# Altium PCB SIM7600_M_V1.0.1.PcbDoc
Units mm, origin at the board's own origin, x right, y up, seen from the top; angles counter-clockwise.
Board outline 149.61 x 116.74 mm, 2 copper layers (Top Layer, Bottom Layer); 83 components, 49 nets, 274 pads, 135 vias.
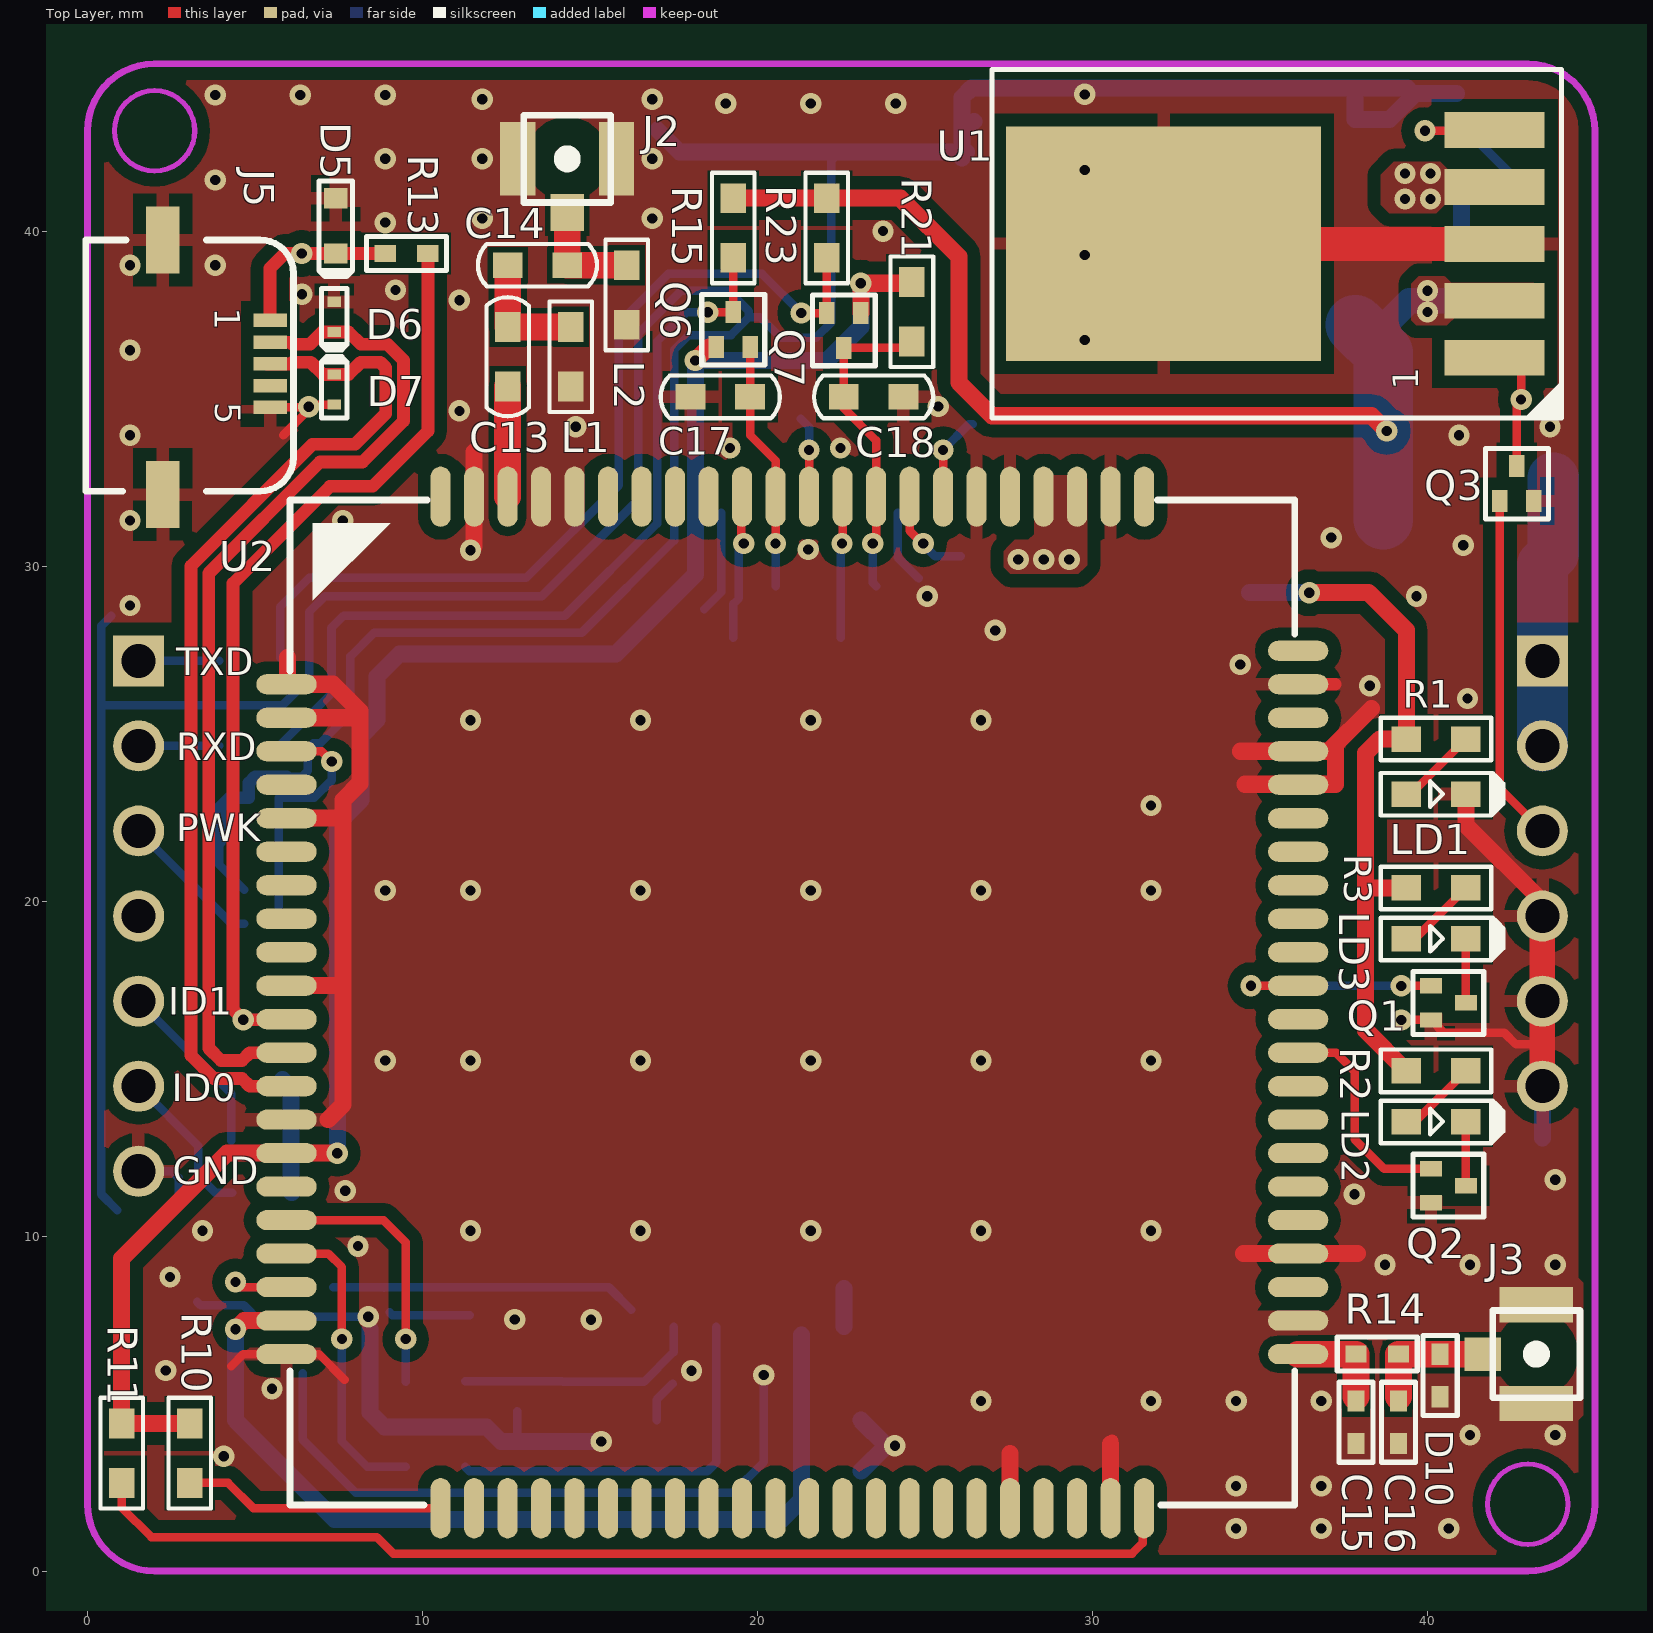
[diagram p0: Top Layer view]
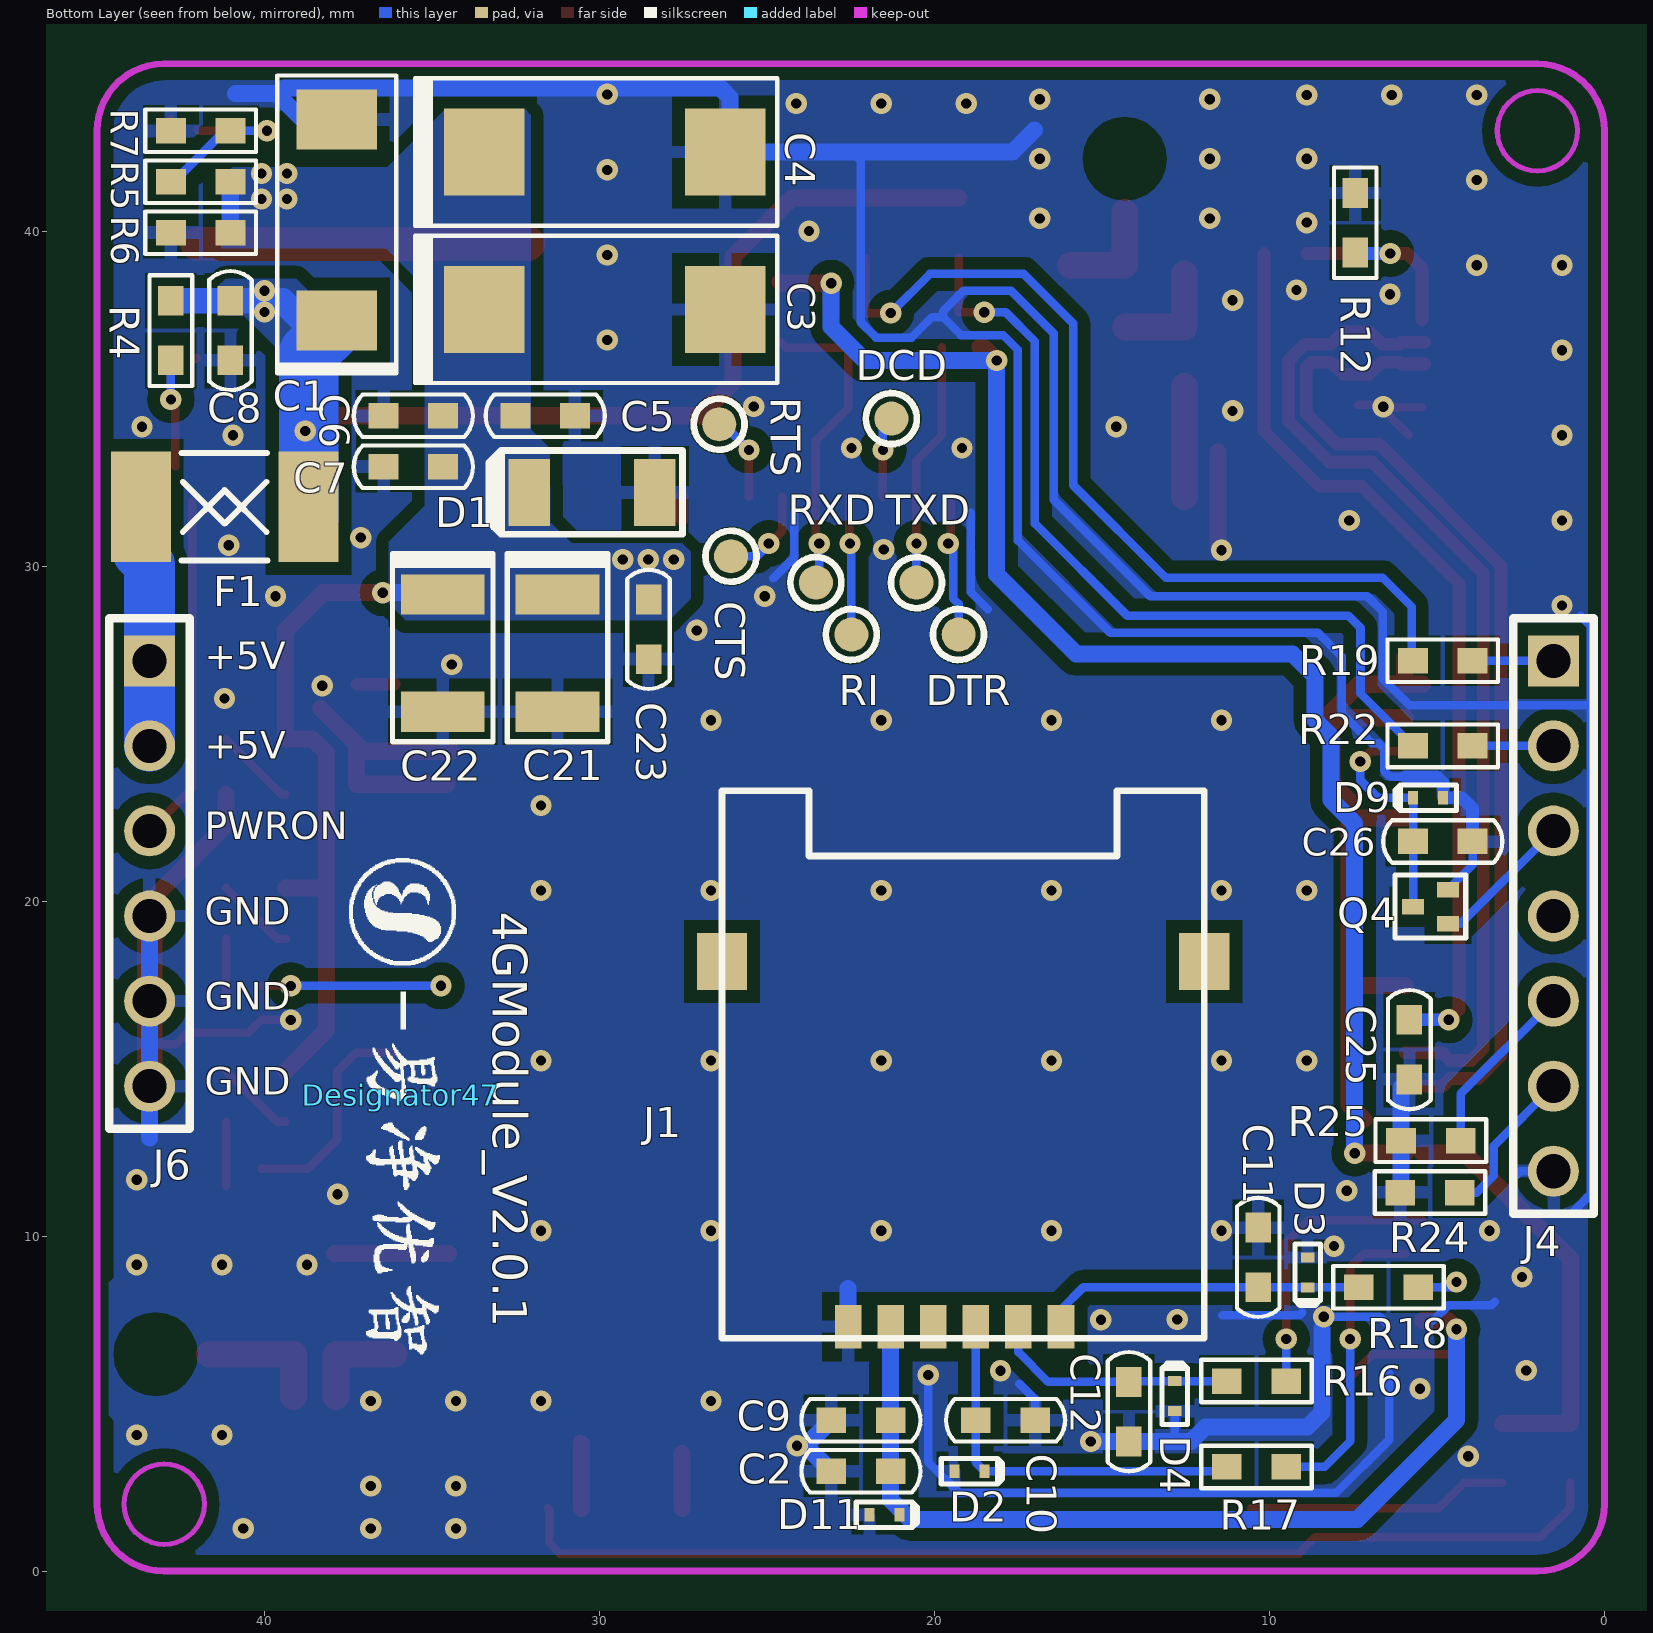
[diagram p1: Bottom Layer view, seen from below]

## Layer stack, top to bottom
Top Layer: signal copper 0.0356
Dielectric: dielectric 0.32, FR-4, Dk 4.8
Bottom Layer: signal copper 0.0356

## Board outline
-44.3,72.578 -44.3,-38.903 -43.132,-40.071 98.854,-40.071 100.023,-38.903 105.306,-33.619 105.306,67.879 96.517,76.667 -37.849,76.667

## Design rules (kind name [scope] priority, off if disabled: settings)
Clearance [All] p1: gap=0.152
ComponentClearance [All] p1: gap=0.127 collisioncheckmode=2 verticalgap=0.254
DiffPairsRouting DiffPair_DiffPairsRouting [InDifferentialPair ('NewDifferentialPair1')] p1: maxlimit=2.54 minlimit=0.152 mostfreqgap=0.152 maxuncoupledlength=12.7
DiffPairsRouting [All] p2: maxlimit=2.54 minlimit=0.152 mostfreqgap=0.152 maxuncoupledlength=12.7
MatchedLengths DiffPair_MatchedLengths [InDifferentialPair ('NewDifferentialPair1')] p1: tolerance=25.4 checknetsindiffpair=TRUE checkdiffpairvsdiffpair=TRUE checkothers=TRUE
PlaneClearance [All] p1: clearance=0.15
PlaneConnect [All] p1: planeconnectstyle=Relief reliefexpansion=0.508 reliefentries=4 reliefconductorwidth=0.508 reliefairgap=0.254
PolygonConnect [All] p1: connectstyle=Relief reliefconductorwidth=0.381 reliefentries=4 polygonreliefangle="90 Angle"
RoutingCorners [All] p1: cornerstyle=Round minsetback=10 maxsetback=10
RoutingVias [All] p1: holewidth=0.711 width=1.27 viastyle="Through Hole" minholewidth=0.305 minwidth=0.635 maxholewidth=1.27 maxwidth=1.27
SolderMaskExpansion [All] p1: expansion=0.102
TestPointUsage [All] p1: valid=0 allowmultiple=FALSE
Testpoint [All] p1: side=15 testpointundercomponent=TRUE minsize=1.016 maxsize=2.54 preferedsize=1.524 minholesize=0 maxholesize=1.016 preferedholesize=0.813 testpointgrid=0.025 style=1021 order=0-112345678
Width DiffPair_Width [InDifferentialPair('NewDifferentialPair1')] p1: maxlimit=0.381 minlimit=0.381 preferedwidth=0.381
Width [All] p2: maxlimit=5.08 minlimit=0.254 preferedwidth=0.381
14 further rules are at their usual default settings.

## Classes and differential pairs
differential pair NewDifferentialPair1: +4G_USB_P -4G_USB_N

## Components (designator, comment, footprint, x,y, rotation, side; value= is the part's Value field where it differs from the comment)
C1 "100uF/16V" C_TAN_C 37.846,40.335 r90 bottom
C2 "33PF" 0603_C 21.308,2.982 r0 bottom
C3 "220uF/10V" C_TAN_D 29.845,37.668 r180 bottom
C4 "220uF/10V" C_TAN_D 29.845,42.367 r180 bottom
C5 "0.1uF" 0603_C 30.734,34.493 r0 bottom
C6 "2.2μF" 0603_C 36.449,34.493 r180 bottom
C7 "33PF" 0603_C 36.449,32.969 r180 bottom
C8 "0.1uF" 0603_C 41.021,36.147 r90 bottom
C9 "0.1uF" 0603_C 21.308,4.506 r0 bottom
C10 "33PF" 0603_C 16.99,4.506 r0 bottom
C11 "33PF" 0603_C 10.338,10.255 r270 bottom
C12 "33PF" 0603_C 14.196,3.871 r90 bottom
C13 "27PF" 0603_C 12.543,35.367 r90 top
C14 "27PF" 0603_C 12.543,38.989 r0 top
C15 "NC" 0402 37.868,3.81 r90 top
C16 "NC" 0402 39.138,3.81 r90 top
C17 "1NF" 0603_C 19.779,35.057 r180 top
C18 "100PF" 0603_C 24.356,35.057 r180 top
C21 "47uF/10V" C_TAN_B 31.256,29.156 r270 bottom
C22 "47uF/10V" C_TAN_B 34.685,29.156 r270 bottom
C23 "1uF" 0603_C 28.538,27.226 r90 bottom
C25 "33PF" 0603_C 5.823,16.459 r270 bottom
C26 "0.1uF" 0603_C 3.937,21.785 r0 bottom
CTS "Component_1" TP-40 26.074,30.299 r0 bottom (schematic designator TP3)
D1 "BZV55C5V1" SOD-80 30.226,32.207 r0 bottom
D2 "ESD9M5.0ST5G" SOD-923 19.403,2.982 r0 bottom
D3 "ESD9M5.0ST5G" SOD-923 8.862,9.366 r90 bottom
D4 "ESD9M5.0ST5G" SOD-923 12.827,4.775 r270 bottom
D5 "PESD12VS1UB" SOD523 7.41,40.988 r90 top
D6 "ESD9L5.0ST5G" SOD-923 7.36,37.896 r90 top
D7 "ESD9L5.0ST5G" SOD-923 7.36,34.823 r270 top
D9 "ESD9M5.0ST5G" SOD-923 4.815,23.089 r180 bottom
D10 "LXES15AAA1-153" 0402 40.383,6.477 r270 top
D11 "ESD9M5.0ST5G" SOD-923 21.943,1.681 r0 bottom
DCD "Component_1" TP-40 21.285,34.408 r0 bottom (schematic designator TP5)
Designator47 "Comment" PIC_AIRFACTORY-1500 35.941,14.224 r270 bottom
DTR "Component_1" TP-40 19.28,27.962 r0 bottom (schematic designator TP4)
F1 "Fuse 2A" 1812_F 43.688,31.775 r180 bottom
J1 "SIM_Card" MicroSIM-6 22.578,7.3 r180 bottom
J2 "CON2" RF-Z 14.321,42.164 r0 top
J3 "CON2" RF-Z 43.253,6.477 r270 top
J4 "CON7" SIP7 1.524,27.178 r270 bottom
J5 "USB" MICROUSB_SMD1 2.743,36.043 r270 top
J6 "CON6" SIP6 43.434,27.178 r270 bottom
L1 "NC" 0603_R 14.425,35.367 r90 top
L2 "NC" 0603_R 16.099,37.211 r90 top
LD1 "WHITE" LED_0603 39.37,23.19 r0 top
LD2 "WHITE" LED_0603 39.37,13.411 r0 top
LD3 "WHITE" LED_0603 39.37,18.872 r0 top
Q1 "DTC143ZEBTL" SC-89 40.107,17.472 r270 top
Q2 "DTC143ZEBTL" SC-89 40.107,12.014 r270 top
Q3 "DTC143ZEBTL" SC-89 42.164,31.946 r0 top
Q4 "DTC143ZEBTL" SC-89 4.674,19.329 r90 bottom
Q6 "DTC143ZEBTL" SC-89 18.768,36.544 r0 top
Q7 "DTC143ZEBTL" SC-89 23.086,37.56 r180 top
R1 "1K" 0603_R 39.37,24.841 r0 top
R2 "1K" 0603_R 39.37,14.935 r0 top
R3 "1K" 0603_R 39.37,20.396 r0 top
R4 "47K" 0603_R 42.799,37.925 r270 bottom
R5 "100K" 0603_R 42.799,41.478 r180 bottom
R6 "750R" 0603_R 42.799,39.954 r180 bottom
R7 "47K" 0603_R 41.021,43.002 r0 bottom
R10 "NC" 0603_R 3.05,4.411 r270 top
R11 "NC" 0603_R 1.018,4.411 r270 top
R12 "47K" 0603_R 7.438,39.366 r90 bottom
R13 "0R" 0402 10.16,39.338 r180 top
R14 "0R" 0402 39.138,6.477 r180 top
R15 "10K" 0603_R 19.276,40.989 r270 top
R16 "22R" 0603_R 11.275,5.675 r180 bottom
R17 "22R" 0603_R 11.275,3.109 r180 bottom
R18 "22R" 0603_R 7.338,8.477 r180 bottom
R19 "0R" 0603_R 3.937,27.178 r0 bottom
R21 "20K" 0603_R 24.61,38.486 r270 top
R22 "0R" 0603_R 3.937,24.638 r0 bottom
R23 "10K" 0603_R 22.07,39.211 r90 top
R24 "0R" 0603_R 6.096,11.303 r180 bottom
R25 "0R" 0603_R 4.293,12.852 r0 bottom (schematic designator 25)
RI "Component_1" TP-40 22.481,27.962 r0 bottom (schematic designator TP2)
RTS "Component_1" TP-40 26.427,34.239 r0 bottom (schematic designator TP7)
RXD "Component_1" TP-40 23.541,29.512 r90 bottom (schematic designator TP6)
TXD "Component_1" TP-40 20.541,29.512 r180 bottom (schematic designator TP1)
U1 "MIC29302" TO-263-5 42.004,36.225 r90 top
U2 "SIM7600CE" SIM7600 5.941,26.477 r0 top

## Footprints (in the part's own frame and the unit in brackets; to place one, negate y for a bottom-side part, rotate by r counter-clockwise, add the part's x,y. Pads: shape width x height; smd on the part's side, far side on the other; paste and mask are expansions set on the pad)
0402 [mil]
  rect 25x20 smd: 1(0,0) 2(50,0)
  silkscreen extent -22,-20 72,20
0603_C [mil]
  rect 35x30 smd: 1(0,0) 2(70,0)
  silkscreen extent -35,-25 105,25, body extent 5,-15 65,15, height 39
0603_R [mil]
  rect 35x30 smd: 1(0,0) 2(70,0)
  silkscreen extent -30,-25 100,25, body extent 5,-15 65,15, height 39
1812_F [mm]
  rect 1.8x3.3 smd: 1(0,0) 2(5,0)
  silkscreen extent 1.2,-1.6 3.78,1.6
C_TAN_B [mm]
  rect 1.2x2.5 smd: 1(0,0) 2(3.5,0)
  silkscreen extent -1.22,-1.5 4.39,1.5, body extent 0,-1.5 3.5,1.5, height 2
C_TAN_C [mm]
  rect 1.8x2.4 smd: 1(-3,0) 2(3,0)
  silkscreen extent -4.57,-1.78 4.32,1.78, body extent -3,-1.78 3,1.78, height 2.6
C_TAN_D [mm]
  rect 2.4x2.6 smd: 1(-3.6,0) 2(3.6,0)
  silkscreen extent -5.67,-2.2 5.15,2.2, body extent -3.67,-2.2 3.53,2.2, height 4.3
LED_0603 [mil]
  rect 35x30 smd: A(0,0) K(70,0)
  silkscreen extent -30,-25 114,25
MicroSIM-6 [mm]
  rect 1.5x1.7 smd: 0(-3.77,10.9) 0(10.63,10.9)
  rect 0.8x1.3 smd: 1(1.27,0) 2(3.81,0) 3(6.35,0) 5(0,0) 6(2.54,0) 7(5.08,0)
  silkscreen extent -3.77,-0.35 10.63,16
MICROUSB_SMD1 [mm]
  rect 0.4x1 smd: 1(-1.299,2.705) 2(-0.649,2.705) 3(0.001,2.705) 4(0.651,2.705) 5(1.301,2.705)
  rect 2x1 smd: 6(-3.699,-0.495) 7(3.901,-0.495)
  silkscreen extent -3.7,-2.8 3.8,3.4
PIC_AIRFACTORY-1500 [mm]
  silkscreen extent -7.06,-1.52 7.75,1.65
RF-Z [mm]
  rect 1x1.1 smd: 1(0,-1.6)
  rect 1.05x2.2 smd: 2(-1.475,0) 2(1.475,0)
  silkscreen extent -1.3,-1.3 1.3,1.3
SC-89 [mil]
  rect 18x26 smd: 1(0,0) 2(40,0) 3(20,41)
  silkscreen extent -17,-21 57,62
SIM7600 [mm]
  oval 1.8x0.6 smd: 1(0,0) 2(0,-1) 3(0,-2) 4(0,-3) 5(0,-4) 6(0,-5) 7(0,-6) 8(0,-7) 9(0,-8) 10(0,-9) 11(0,-10) 12(0,-11) 13(0,-12) 14(0,-13) 15(0,-14) 16(0,-15) 17(0,-16) 18(0,-17) 19(0,-18) 20(0,-19) 41(30.2,-19) 42(30.2,-18) 43(30.2,-17) 44(30.2,-16) 45(30.2,-15) 46(30.2,-14) 47(30.2,-13) 48(30.2,-12) 49(30.2,-11) 50(30.2,-10) 51(30.2,-9) 52(30.2,-8) 53(30.2,-7) 54(30.2,-6) 55(30.2,-5) 56(30.2,-4) 57(30.2,-3) 58(30.2,-2) 59(30.2,-1) 60(30.2,0) 81(0,-20) 82(30.2,-20) 85(30.2,1)
  oval 0.6x1.8 smd: 21(5.6,-24.6) 22(6.6,-24.6) 23(7.6,-24.6) 24(8.6,-24.6) 25(9.6,-24.6) 26(10.6,-24.6) 27(11.6,-24.6) 28(12.6,-24.6) 29(13.6,-24.6) 30(14.6,-24.6) 31(15.6,-24.6) 32(16.6,-24.6) 33(17.6,-24.6) 34(18.6,-24.6) 35(19.6,-24.6) 36(20.6,-24.6) 37(21.6,-24.6) 38(22.6,-24.6) 39(23.6,-24.6) 40(24.6,-24.6) 61(24.6,5.6) 62(23.6,5.6) 63(22.6,5.6) 64(21.6,5.6) 65(20.6,5.6) 66(19.6,5.6) 67(18.6,5.6) 68(17.6,5.6) 69(16.6,5.6) 70(15.6,5.6) 71(14.6,5.6) 73(12.6,5.6) 74(11.6,5.6) 75(10.6,5.6) 76(9.6,5.6) 77(8.6,5.6) 78(7.6,5.6) 79(6.6,5.6) 80(5.6,5.6) 83(25.6,-24.6) 84(4.6,-24.6) 86(4.6,5.6) 87(25.6,5.6)
  oval 0.6x1.8 smd paste+0: 72(13.6,5.6)
  silkscreen extent 0.1,-24.5 30.1,5.5
SIP6 [mil]
  rect 60x60 hole 40: 1(0,0)
  round 60 hole 40: 2(100,0) 3(200,0) 4(300,0) 5(400,0) 6(500,0)
  silkscreen extent -50,-47 550,47
SIP7 [mil]
  rect 60x60 hole 40: 1(0,0)
  round 60 hole 40: 2(100,0) 3(200,0) 4(300,0) 5(400,0) 6(500,0) 7(600,0)
  silkscreen extent -50,-47 650,47
SOD523 [mm]
  rect 0.6x0.7 smd: 1(0,0) 2(-1.65,0)
  silkscreen extent -2.34,-0.5 0.51,0.5
SOD-80 [mm]
  rect 1.25x2 smd: 1(-1.875,0) 2(1.875,0)
  silkscreen extent -2.7,-1.25 3.08,1.25
SOD-923 [mm]
  rect 0.3x0.4 smd: 1(0,0) 2(-0.9,0)
  silkscreen extent -1.43,-0.38 0.4,0.38
TO-263-5 [mm]
  rect 1.07x3 smd: 1(0,0) 2(1.7,0) 3(3.4,0) 4(5.1,0) 5(6.8,0)
  rect 7x9.4 smd: 6(3.41,9.878)
  silkscreen extent -1.8,-2 8.6,15, body extent 0,0 6.8,12.6, height 4.5
TP-40 [mil]
  round 40 smd: 1(0,0)
  silkscreen extent -30,-30 30,30

## Part data
C1 C3 C4 C21 C22: library part ECAP, "E-CAP"
C2 C9 C10 C11 C12 C13 C14 C15 C16 C25: library part CAP, "CAP"
C5 C6 C7 C8 C17 C18 C23 C26: library part "Cap Semi", "Capacitor"
D1 D9 D11: library part "DIODE SCHOTTKY"
D2 D3 D4 D5 D6 D7 D10: library part "DIODE TVS BI-DIR"
F1: library part "Fuse 1", "Fuse"
J4: library part CON8
J5: library part USB-M
J6: library part CON7
L1 L2: library part L
LD1 LD2 LD3: library part LED, "LED"
Q1 Q2 Q3 Q4: library part NPN
Q6 Q7: library part DTC143ZETL
R1 R2 R3 R6 R10 R11 R12 R13 R14 R15 R19 R21 R22 R23 R24 R25: library part RES1
R4 R5 R7 R16 R17 R18: library part R0.25W, "RESISTOR"
U2: library part L506

## Via types
v1: diameter 0.635, hole 0.305, Top Layer to Bottom Layer, tented both sides, 135 vias

## Nets (pads, with @x,y where several pads share a name; then routed paths per layer and width w, separated by ;. In a path a pad name is that pad's centre, name@x,y a point inside that pad or via, vN(x,y) a via of type N, cw(c..) or ccw(c..) an arc to the next point about the centre after c; other vN are vias at no path point)
4G_MAIN_ANT: C15.2 R14.2 U2.82 | length 3
  Top Layer w0.8: U2.82 R14.2 C15.2@37.868,5.207
4G_NETLIGHT: Q1.1 U2.51 | length 6.8
  Top Layer w0.254: v1(34.735,17.477) U2.51 ; v1(39.218,17.472) Q1.1
  Bottom Layer w0.254: v1(34.735,17.477) 39.213,17.477 v1(39.218,17.472)
4G_STATUS: Q2.1 U2.49 | length 6.6
  Top Layer w0.254: U2.49 37.276,15.477 37.829,14.924 37.829,12.892 38.706,12.014 Q2.1
4G_USB_N: D6.2 J5.2 U2.12 | length 30.9
  Top Layer w0.381: J5.2@5.364,36.684 5.448,36.684 6.062,36.684 6.12,36.626 6.638,36.626 7.008,36.996 D6.2 7.79,36.996 8.16,36.626 8.959,36.626 9.436,36.149 9.436,34.336 8.209,33.109 6.939,33.109 3.62,29.789 3.62,15.773 3.62,15.611 3.987,15.244 4.609,15.244 4.842,15.477 U2.12
4G_USB_P: D7.2 J5.3 U2.13 | length 30.9
  Top Layer w0.381: J5.3@5.364,36.034 5.448,36.034 6.062,36.034 6.12,36.093 6.661,36.093 7.031,35.723 D7.2 7.788,35.723 8.158,36.093 8.738,36.093 8.903,35.928 8.903,34.557 7.988,33.642 6.718,33.642 3.086,30.01 3.086,15.391 3.766,14.71 4.609,14.71 4.842,14.477 U2.13
4G_USB_VBUS: C25.1 R13.1 U2.11 | length 28.6
  Top Layer w0.381: v1@4.63,16.477 4.343,16.764 4.343,29.489 7.239,32.385 8.509,32.385 10.16,34.036 R13.1 ; v1(4.648,16.459) 5.923,16.459 U2.11
  Bottom Layer w0.381: v1(4.648,16.459) C25.1 C25.1@5.841,16.477
+3.8V: C3.1 C4.1 C5.2 C6.2 C7.2 C21.1 C22.1 C23.2 D1.2 R1.1 R2.1 R3.1 R5.2 R6.2 U1.4 U2.62 U2.63 | length 22.5
  Top Layer w0.508: v1(36.471,29.21) 38.249,29.21 39.37,28.089 R1.1 38.579,24.841 38.159,24.421 38.159,16.146 R2.1 ; 38.159,20.393 38.162,20.396 R3.1
  Bottom Layer w0.508: C22.1@34.693,29.21 v1(36.471,29.21) ; R6.2 R5.2
  other v1: 27.785,30.199 28.547,30.199 29.309,30.199 39.333,40.966 40.095,40.966 39.333,41.728 40.095,41.728
+5V: C1.1 C8.2 F1.2 R4.1 R15.1 R23.2 U1.2 | length 35.6
  Top Layer w0.508: R15.1 24.264,40.989 26.01,39.243 26.01,35.484 27,34.493 38.329,34.493 v1(38.786,34.036)
  Bottom Layer w0.508: F1.2@38.354,31.238 F1.2@38.688,31.572 ; F1.2@38.608,31.619 F1.2@38.688,31.699
  Bottom Layer w0.762: C1.1@38.702,37.29 38.829,37.29 39.464,37.925 R4.1
  Bottom Layer w1.778: C1.1@37.846,37.208 38.688,36.366 F1.2 ; F1.2@38.688,31.394 F1.2@38.688,31.699
  other v1: 40.005,37.592 40.005,38.227
COEX1: R11.2 U2.83 | length 33
  Top Layer w0.254: R11.2 1.018,1.903 1.905,1.016 8.636,1.016 9.127,0.525 31.183,0.525 31.496,0.838 31.496,1.832 U2.83
COEX2: R10.2 U2.84 | length 7.8
  Top Layer w0.254: R10.2 4.193,2.633 4.949,1.877 U2.84
CTS: CTS.1 U2.67 | length 2.9
  Top Layer w0.254: U2.67 24.541,31.061 v1@24.922,30.68
  Bottom Layer w0.254: v1@24.922,30.68 25.303,30.299 CTS.1
  other v1: 24.947,30.68
DCD: DCD.1 U2.70 | length 2.4
  Top Layer w0.254: U2.70 v1(21.541,33.474)
  Bottom Layer w0.254: DCD.1 21.541,34.153 v1(21.541,33.474)
DTR: DTR.1 U2.72 | length 4.3
  Top Layer w0.254: v1@19.522,30.699 U2.72@19.522,32.077
  Bottom Layer w0.254: DTR.1@19.28,27.861 19.28,28.873 19.448,29.04 19.448,30.536 v1(19.592,30.68)
GND: C1.2 C2.2 C3.2 C4.2 C5.1 C6.1 C7.1 C8.1 C9.2 C10.1 C11.1 C12.1 C15.1 C16.1 C17.2 C18.1 C21.2 C22.2 C23.1 C25.2 C26.1 D1.1 D2.1 D3.1 D4.1 D5.1 D6.1 D7.1 D9.1 D10.2 D11.1 J1.5 J2.2 J3.2 J4.7 J5.5 J5.6 J5.7 J6.4 J6.5 J6.6 L1.1 L2.1 LD1.K Q1.2 Q2.2 Q3.2 Q4.2 R6.1 R7.2 R12.2 R24.1 R25.2 U1.3 U1.6 U2.1 U2.2 U2.5 U2.10 U2.14 U2.37 U2.40 U2.41 U2.43 U2.57 U2.58 U2.60 U2.61 U2.64 U2.65 U2.77 U2.78 U2.80 U2.81 | length 245.8
  Top Layer w0.254: 4.293,6.121 4.648,6.477 6.909,6.477 7.671,5.715 ; J5.5@5.448,34.742 v1@6.585,34.742 ; 5.842,33.909 v1@6.585,34.652 ; v1@6.666,34.823 D7.1 ; v1(39.218,16.456) Q1.2 40.488,16.075 42.294,16.075 42.647,15.723 43.383,15.723
  Top Layer w0.381: 7.577,17.477 7.631,17.531 ; U2.37 U2.37@27.541,2.66 ; U2.64@27.541,31.398 U2.64 ; 30.541,3.795 30.541,3.842 30.582,3.883 ; 34.537,23.477 34.551,23.477 ; U2.60 37.252,26.477 ; 37.405,24.776 37.405,24.832
  Top Layer w0.508: U2.1@5.433,26.477 7.327,26.477 8.128,25.676 8.128,23.52 7.631,23.023 7.631,13.928 7.18,13.477 ; U2.10 7.582,17.477 ; U2.5 7.631,22.477 ; U2.2 8.038,25.477 8.128,25.567 ; U2.1@5.969,26.477 5.969,27.28 ; v1@11.541,30.591 11.541,33.409 ; U2.37 27.541,3.513 ; U2.40 30.541,3.795 ; 34.426,24.477 37.05,24.477 38.329,25.756 ; 34.516,9.477 37.919,9.477 ; 34.551,23.492 37.258,23.492 37.258,24.685 ; LD1.K 41.148,22.273 43.434,19.987 J6.4
  Top Layer w0.762: J6.6 J6.4
  Top Layer w1.016: U1.6 32.137,39.625 U1.3
  Bottom Layer w0.254: 0.406,25.854 5.825,25.854 6.622,26.651 6.622,28.645 7.083,29.105 13.56,29.105 16.442,31.987 16.442,36.954 17.712,38.224 19.135,38.224 19.744,37.614 19.744,37.436 ; 0.711,28.524 0.406,28.219 0.406,11.252 0.889,10.77 ; J4.7 2.52,11.938 2.718,11.74 2.718,11.125 ; 3.274,8.037 3.376,7.935 4.664,7.935 5.121,7.478 ; C26.1 3.937,21.082 Q4.2 ; 5.944,23.715 6.401,23.715 6.579,23.893 6.579,24.553 6.736,24.711 6.943,24.711 7.849,25.617 7.849,27.309 8.553,28.013 14.754,28.013 17.509,30.768 17.509,36.457 17.955,36.903 19.211,36.903 19.744,37.436 ; 6.424,5.904 6.424,3.923 8.011,2.335 19.264,2.335 20.19,3.261 v1(20.19,5.852) ; 6.477,7.366 6.706,7.595 v1(8.382,7.595) ; 9.017,7.722 9.093,7.645 11.405,7.645 ; 12.827,4.026 D4.1 ; C10.1 16.99,5.065 ; 16.99,5.116 17.473,5.598 ; 18.415,28.721 18.923,29.229 18.923,31.591 ; 22.462,42.367 22.208,42.113 22.208,37.284 21.751,36.827 20.684,36.827 20.074,37.436 19.744,37.436 ; 24.181,31.591 24.181,30.27 24.816,29.635
  Bottom Layer w0.381: C26.1 3.937,22.775 4.25,23.089 D9.1 4.815,23.526 5.004,23.715 5.944,23.715
  Bottom Layer w0.508: C25.2 6.071,14.434 6.071,11.328 R24.1 ; 8.43,7.225 8.43,4.735 8.862,4.304 11.91,4.304 12.343,3.871 C12.1 v1(15.339,3.871) ; 17.013,43.028 17.674,42.367 C4.2 ; J1.5 22.578,8.443 ; C2.2 v1@23.848,3.744 ; C9.2 v1@23.848,3.744 ; v1(24.102,3.744) v1@23.848,3.744 ; C4.2@26.104,42.189 26.104,43.993 26.384,44.272 39.412,44.272 ; C4.2@26.333,43.155 C4.2@26.46,43.282 ; C1.2@37.846,44.062 C1.2 38.871,43.335 39.649,44.113 40.866,44.113 ; 43.434,12.929 J6.4
  other v1: 34.29,1.27 36.83,1.27 40.64,1.27 34.29,2.54 36.83,2.54 4.064,3.429 41.275,4.064 43.815,4.064 26.67,5.08 31.75,5.08 34.29,5.08 36.83,5.08 5.509,5.446 18.031,5.979 2.337,5.988 15.034,7.503 12.751,7.512 2.464,8.782 38.735,9.144 41.275,9.144 43.815,9.144 8.077,9.703 3.429,10.16 11.43,10.16 16.51,10.16 21.59,10.16 26.67,10.16 31.75,10.16 37.821,11.252 7.696,11.354 43.815,11.684 8.89,15.24 11.43,15.24 16.51,15.24 21.59,15.24 26.67,15.24 31.75,15.24 8.89,20.32 11.43,20.32 16.51,20.32 21.59,20.32 26.67,20.32 31.75,20.32 31.75,22.86 11.43,25.4 16.51,25.4 21.59,25.4 26.67,25.4 41.199,26.054 38.278,26.435 34.414,27.07 27.102,28.086 1.27,28.829 25.07,29.102 39.675,29.102 11.43,30.48 21.514,30.499 41.072,30.626 37.132,30.854 1.27,31.369 7.62,31.369 19.177,33.528 22.479,33.528 1.27,33.909 40.945,33.909 14.575,34.163 43.658,34.163 11.1,34.639 6.604,34.761 25.4,34.773 1.27,36.449 29.769,36.754 11.1,37.941 6.401,38.119 9.195,38.246 1.27,38.989 3.81,38.989 29.769,39.294 23.749,40.005 8.89,40.259 11.781,40.386 16.861,40.386 3.81,41.529 29.769,41.834 8.89,42.164 11.781,42.164 16.861,42.164 19.05,43.815 21.59,43.815 24.13,43.815 11.781,43.942 16.861,43.942 3.81,44.069 6.35,44.069 8.89,44.069 29.769,44.088
GPS_ANT: C13.1 U2.79 | length 3.3
  Top Layer w0.8: U2.79 12.541,35.365 C13.1
ID_0: J4.6 R24.2 | length 4.6
  Bottom Layer w0.254: J4.6 3.302,12.7 3.302,11.811 3.81,11.303 R24.2
ID_1: J4.5 R25.1 | length 5.3
  Bottom Layer w0.254: J4.5 4.293,14.249 R25.1
NetC13_2: C13.2 C14.1 L1.2 | length 3.3
  Top Layer w0.8: C14.1@12.543,38.735 C13.2 L1.2@14.298,37.145
NetC14_2: C14.2 J2.1 L2.2 | length 3.2
  Top Layer w0.8: J2.1 C14.2 L2.2@15.946,38.989
NetC16_2: C16.2 D10.1 J3.1 R14.1 | length 3.8
  Top Layer w0.8: C16.2@39.138,5.207 R14.1 J3.1
NetC26_2: C26.2 D9.2 Q4.3 U2.3 | length 7.1
  Top Layer w0.254: U2.3 6.985,24.477 v1(7.29,24.172)
  Bottom Layer w0.254: Q4.3 D9.2 6.765,23.089 7.29,23.613 v1(7.29,24.172)
NetD5_2: D5.2 J5.1 R12.1 R13.2 | length 6.3
  Top Layer w0.381: J5.1@5.445,37.361 5.445,38.898 5.743,39.195 5.886,39.338 R13.2 ; D5.2 D5.2@7.438,39.366
  Bottom Layer w0.254: R12.1@7.438,39.338 7.451,39.324 R12.1@7.465,39.338
  Bottom Layer w0.381: v1(6.394,39.338) R12.1@7.438,39.338
NetLD1_A: LD1.A R1.2 | length 2.5
  Top Layer w0.254: LD1.A 39.497,23.19 R1.2
NetLD2_A: LD2.A R2.2 | length 2.4
  Top Layer w0.254: LD2.A 39.624,13.411 R2.2
NetLD2_K: LD2.K Q2.3 | length 1.9
  Top Layer w0.254: Q2.3 LD2.K
NetLD3_A: LD3.A R3.2 | length 2.4
  Top Layer w0.254: LD3.A 39.624,18.872 R3.2
NetLD3_K: LD3.K Q1.3 | length 1.9
  Top Layer w0.254: Q1.3 LD3.K
NetQ3_3: Q3.3 R4.2 U1.1 | length 4.6
  Top Layer w0.254: U1.1 U1.1@42.037,36.192 ; Q3.3 42.672,34.849 v1(42.799,34.976) U1.1@42.799,36.17
  Bottom Layer w0.254: v1@42.799,34.874 R4.2@42.799,36.144
NetQ6_3: Q6.3 R15.2 R22.2 | length 24.9
  Top Layer w0.254: v1(18.514,37.585) Q6.3 R15.2
  Bottom Layer w0.254: R22.2 7.283,26.206 7.283,28.162 7.642,28.521 14.246,28.521 17.001,31.276 17.001,36.711 17.875,37.585 v1(18.514,37.585)
NetQ7_2: Q7.2 R19.2 R23.1 | length 27
  Top Layer w0.254: v1(21.308,37.56) Q7.2 R23.1
  Bottom Layer w0.254: R19.2@5.759,27.273 5.759,28.797 6.626,29.664 13.103,29.664 15.858,32.419 15.858,37.249 17.337,38.728 20.14,38.728 v1(21.308,37.56) v1@21.308,37.676
NetR5_1: R5.1 R7.1 U1.5 | length 6.1
  Top Layer w0.254: v1(39.926,43.002) 41.981,43.002 U1.5 ; U1.5@42.462,43.002 U1.5@42.799,43.339
  Bottom Layer w0.254: v1(39.926,43.002) 41.19,43.002 R5.1@42.714,41.478 ; R5.1@42.669,41.478 R5.1
NetR16_2: R16.2 U2.17 | length 8.5
  Top Layer w0.254: U2.17@5.433,10.477 8.835,10.477 9.497,9.815 v1(9.497,6.928)
  Bottom Layer w0.254: R16.2@9.497,5.649 v1(9.497,6.928)
NetR17_2: R17.2 U2.18 | length 9.2
  Top Layer w0.254: U2.18 7.193,9.477 7.592,9.078 v1(7.592,6.931)
  Bottom Layer w0.254: v1(7.592,6.931) 7.592,3.871 8.354,3.109 R17.2
NetR18_2: R18.2 U2.19 | length 2.4
  Top Layer w0.254: v1(4.417,8.629) 4.569,8.477 U2.19@5.433,8.477
  Bottom Layer w0.254: v1@4.417,8.477 R18.2 ; v1(4.417,8.629) v1@4.569,8.477
PWRKEY: J4.3 Q4.1 | length 4.3
  Bottom Layer w0.254: J4.3 4.293,19.329 Q4.1
PWRON: J6.3 Q3.1 | length 10.4
  Top Layer w0.254: Q3.1 42.164,23.368 J6.3
RESET: J4.4
RI: RI.1 U2.69 | length 4.2
  Top Layer w0.254: v1@22.541,30.68 U2.69
  Bottom Layer w0.254: RI.1@22.481,27.861 22.481,30.62 v1@22.541,30.68
  other v1: 22.525,30.68
RTS: RTS.1 U2.66 | length 2.6
  Top Layer w0.254: U2.66 v1(25.541,33.474)
  Bottom Layer w0.254: v1(25.541,33.474) 26.306,34.239 RTS.1
RXD: C18.2 Q7.3 R21.2 RXD.1 U2.68 | length 9.7
  Top Layer w0.254: v1(23.439,30.68) 23.541,30.782 23.541,33.759 22.578,34.722 Q7.3 24.421,36.519 R21.2
  Bottom Layer w0.254: v1(23.439,30.68) 23.439,29.512 RXD.1@23.541,29.41
RXD_MCU: J4.2 R22.1 | length 2.4
  Bottom Layer w0.254: J4.2 R22.1
SIM_CLK: C11.2 D3.2 J1.3 R18.1 | length 9.2
  Bottom Layer w0.254: R18.1 8.851,8.477 D3.2 8.873,8.477 15.559,8.477 J1.3@16.228,7.808
SIM_DATA: C12.2 D4.2 J1.7 R16.1 | length 7.4
  Bottom Layer w0.254: R16.1 14.17,5.675 C12.2 16.609,5.649 17.498,6.538 J1.7
SIM_RST: C10.2 D2.2 J1.2 R17.1 | length 11.7
  Bottom Layer w0.254: R17.1 11.402,2.982 D2.2 18.768,3.247 J1.2
SIM_VDD: C2.1 C9.1 D11.2 J1.1 U2.20 | length 27.1
  Top Layer w0.508: v1(4.417,7.223) 4.671,7.477 U2.20@5.433,7.477
  Bottom Layer w0.508: v1(4.417,7.223) 4.417,4.506 7.376,1.547 20.728,1.547 21.308,2.127 C9.1 J1.1@21.308,7.046
TXD: C17.1 Q6.2 TXD.1 U2.71 | length 7.5
  Top Layer w0.254: Q6.2 19.779,36.539 19.779,33.917 20.541,33.155 v1(20.541,30.68)
  Bottom Layer w0.254: TXD.1@20.541,29.41 v1(20.541,30.68)
TXD_MCU: J4.1 R19.1 | length 2.4
  Bottom Layer w0.254: J4.1 R19.1
VCC_5V: F1.1 J6.1 J6.2 | length 8.1
  Bottom Layer w1.524: J6.2 43.434,30.055 43.757,30.378 F1.1@43.757,32.639
VDD1V8: Q6.1 Q7.1 R10.1 R11.1 R21.1 U2.15 | length 55.8
  Top Layer w0.508: R10.1 R11.1 1.018,9.331 4.164,12.477 U2.15@5.433,12.477 ; U2.15 v1(7.456,12.477) ; v1(18.144,36.141) 18.547,36.544 Q6.1@18.641,36.544 ; Q7.1 v1(23.086,38.449) 24.573,38.449 R21.1
  Bottom Layer w0.508: v1(7.456,12.477) 7.456,22.315 8.158,23.017 8.158,24.922 8.643,25.407 8.643,26.706 9.315,27.378 15.77,27.378 18.144,29.752 v1(18.144,36.141) 22.081,36.141 23.086,37.146 v1(23.086,38.449)
pads on no net: J1.0 J1.6 J5.4 U2.4 U2.6 U2.7 U2.8 U2.9 U2.16 U2.21 U2.22 U2.23 U2.24 U2.25 U2.26 U2.27 U2.28 U2.29 U2.30 U2.31 U2.32 U2.33 U2.34 U2.35 U2.36 U2.38 U2.39 U2.42 U2.44 U2.45 U2.46 U2.47 U2.48 U2.50 U2.52 U2.53 U2.54 U2.55 U2.56 U2.59 U2.73 U2.74 U2.75 U2.76 U2.85 U2.86 U2.87

## Polygon pours and split planes (outlines as drawn)
GND on Top Layer "Top Layer-No Net 7" (solid, remove dead copper, pour order 1002): 7.338,46.425 7.338,40.76 7.236,40.659 7.313,40.735 11.173,40.735 11.173,42.894 12.139,43.859 12.189,43.91 17.904,43.91 17.904,44.85 16.584,46.171
GND on Top Layer "Top Layer-No Net" (solid, remove dead copper, pour order 1000): 33.731,7.772 37.033,7.772 38.125,8.865 38.394,9.134 44.508,9.134 44.508,8.756 44.653,8.611 44.653,4.648 44.552,4.547 44.508,4.503 44.508,4.096 44.508,4.02 44.272,3.785 41.758,3.785 40.742,2.769 40.564,2.591 37.389,2.591 37.211,2.591 36.144,3.658
+3.8V on Top Layer "Top Layer-No Net 3" (solid, remove dead copper, pour order 1001): 28.263,32.715 28.263,30.963 28.086,30.785 27.679,30.785 27.501,30.607 27.349,30.455 27.349,30.226 27.349,29.972 27.552,29.769 29.584,29.769 29.787,29.972 29.838,30.023 29.838,31.877 29.838,32.614 29.737,32.715 28.263,32.715
+3.8V on Top Layer "Top Layer-No Net 2" (solid, remove dead copper, pour order 1000): 40.767,40.8 40.513,40.8 40.259,40.546 39.116,40.546 38.862,40.546 38.608,40.8 38.608,41.689 38.989,42.07 40.386,42.07 40.64,41.816 41.021,41.816
+5V on Top Layer "Top Layer-No Net 1" (solid, remove dead copper, pour order 1000): 43.172,38.458 40.709,38.458 40.531,38.636 40.505,38.662 39.743,38.662 39.515,38.433 39.515,38.408 39.515,37.341 39.667,37.188 40.582,37.188 40.861,37.468 40.937,37.544 43.299,37.544
GND on Top Layer "Top Layer-No Net 6" (solid, remove dead copper, pour order 1001): -2.743,48.201 11.278,48.201 12.04,47.439 12.268,47.21 12.268,42.994 12.268,41.266 11.582,40.581 11.455,40.454 11.455,39.361 11.455,31.665 11.608,31.513 11.963,31.157 13.538,31.157 13.538,31.437 14.072,31.97 14.427,32.326 14.427,34.51 14.427,35.678 15.418,36.669 16.662,37.914 16.662,39.26 16.662,43.806 16.332,44.137 16.104,44.365 16.104,46.067 46.888,46.067 47.955,45 47.955,1.617 44.247,-2.091 -1.168,-2.091 -4.75,1.49 -4.75,46.194 -2.743,48.201
GND on Top Layer "Top Layer-No Net 8" (solid, remove dead copper, pour order 1003): 11.405,43.993 16.739,43.993 17.365,43.366 17.365,37.631 15.618,35.884 15.339,35.604 15.339,34.08 15.339,33.475 15.027,33.163 14.834,32.97 14.834,31.242 14.834,31.184 15.027,30.991 15.027,30.644 14.856,30.473 11.173,30.473 11.021,30.626 11.021,30.986 11.027,30.991 11.3,31.265 11.3,32.785 11.3,32.918 11.055,33.163 11.055,43.643 11.278,43.866
GND on Bottom Layer "Bottom Layer-No Net 3" (solid, remove dead copper, pour order 1003): 11.252,43.986 16.104,43.986 17.221,42.869 17.139,42.786 17.139,39.207 10.113,39.207 9.093,40.227
GND on Bottom Layer "Bottom Layer-No Net 2" (solid, remove dead copper, pour order 1002): 39.675,10.363 42.901,10.363 44.653,8.611 44.653,4.648 44.425,4.42 39.776,4.42 38.684,5.512 39.319,6.147 39.319,9.5
+3.8V on Bottom Layer "Bottom Layer-No Net" (solid, pour order 1001): 31.471,32.458 31.471,31.315 30.836,30.68 28.169,30.68 27.534,30.68 27.28,30.426 27.28,29.664 27.28,29.029 27.788,28.521 27.915,28.394 35.789,28.394 36.297,28.902 36.297,30.426 36.297,30.727 35.223,31.801
+3.8V on Bottom Layer "Bottom Layer-No Net 4" (solid, remove dead copper, pour order 1003): 41.04,41.834 40.963,41.91 38.169,41.91 36.341,41.91 34.613,43.637 32.226,43.637 32.048,43.459 32.048,34.087 31.489,33.528 31.489,31.14 31.692,30.937 34.359,30.937 35.223,31.801 35.223,38.329 36.341,39.446 36.391,39.497 41.294,39.497 41.294,41.58 41.167,41.707
+5V on Bottom Layer "Bottom Layer-No Net 1" (solid, remove dead copper, pour order 1002): 38.575,38.103 39.058,38.585 40.048,38.585 41.166,38.585 41.394,38.357 41.394,37.671 41.217,37.493 40.632,37.493 40.048,36.909 39.642,36.503 38.956,36.503 38.905,36.503 38.27,37.138
GND on Bottom Layer "Bottom Layer-No Net 5" (solid, remove dead copper, pour order 1006): -2.322,46.7 11.14,46.7 12.283,45.557 12.156,45.43 12.156,40.858 12.156,40.35 12.283,40.223 16.347,40.223 16.347,45.049 16.982,45.684 17.109,45.811 45.43,45.811 45.557,45.811 46.319,45.049 47.335,44.033 47.335,1.234 47.335,0.218 44.795,-2.322 44.541,-2.576 -0.036,-2.576 -2.068,-2.576 -3.465,-1.179 -3.465,45.557 -2.322,46.7
GND on Bottom Layer "Bottom Layer-No Net 7" (solid, remove dead copper, pour order 1007): 10.389,46.609 10.897,46.101 10.897,40.386 16.312,40.386 16.612,40.686 17.628,41.702 17.628,46.101 11.913,46.101 11.659,46.355

## Keep-outs
Keep-Out Layer:
  circle w0.152: c43,2 r1.2
  circle w0.152: c2,43 r1.2
  lines w0.203: 0,2 ccw(c2,2) 2,0 43,0 ccw(c43,2) 45,2 45,43 ccw(c43,43) 43,45 2,45 ccw(c2,43) 0,43 0,2

## Silkscreen, mask and mechanical layers (free items; w line width, h text height)
Top Overlay:
  text "TXD" at 2.65,26.743 h0.81
  text "RXD" at 2.65,24.203 h0.81
  text "PWK" at 2.65,21.79 h0.81
  text "ID1" at 2.413,16.612 h0.81
  text "ID0" at 2.515,14.021 h0.81
  text "GND" at 2.54,11.557 h0.81
Bottom Overlay:
  text "+5V" at 41.783,26.924 h0.81
  text "+5V" at 41.783,24.257 h0.81
  text "PWRON" at 41.783,21.844 h0.81
  text "4GModule_V2.0.1" at 33.528,19.685 h1.78 r90
  text "GND" at 41.783,19.304 h0.81
  text "GND" at 41.783,16.764 h0.81
  text "GND" at 41.783,14.224 h0.81
Mechanical 1:
  circle w0.152: c2,43 r1.2
  circle w0.152: c43,2 r1.2
  lines w0.203: 0,2 ccw(c2,2) 2,0 43,0 ccw(c43,2) 45,2 45,43 ccw(c43,43) 43,45 2,45 ccw(c2,43) 0,43 0,2

## Text inside footprints (layer, text, board x,y; h text height)
J5: Top Overlay "5" at 3.817,34.899 h0.76 r270; Top Overlay "1" at 3.792,37.719 h0.76 r270
U1: Top Overlay "1" at 39.725,35.273 h0.76 r90